# EAGLE board PocketBeagleCape (EAGLE 8.4.2)

Size 55 x 35 mm. Coordinates in mm from the lower left corner, seen from the top.
Outline: 45,35 10,35 arc90 0,25 0,10 arc90 10,0 45,0 arc90 55,10 55,25 arc90 45,35
Copper layers (1*16): Top 0.035mm / dielectric 1.5mm / Bottom 0.035mm
Design rules "default *": minimum track width 6mil, minimum drill 10mil, track to track 6mil, track to pad 6mil, pad to pad 6mil, via to via 6mil, smd to smd 6mil, copper to edge 10mil, drill to drill 8mil, minimum pad ring 10mil, minimum via ring 5mil, stop-mask expansion 4mil, vias tented up to drill 40mil, thermal gap 6mil

## Footprints (pad centres in the part's own frame; a part is rotated, then mirrored left to right if it is on the bottom)
TH-2X18-(35MIL-DIA)-W/O-SILK = drill 0.889 pad 1.524 square: 1 -21.59,-1.27 | drill 0.889 pad 1.524 octagon: 2 -21.59,1.27; 3 -19.05,-1.27; 4 -19.05,1.27; 5 -16.51,-1.27; 6 -16.51,1.27; 7 -13.97,-1.27; 8 -13.97,1.27; 9 -11.43,-1.27; 10 -11.43,1.27; 11 -8.89,-1.27; 12 -8.89,1.27; 13 -6.35,-1.27; 14 -6.35,1.27; 15 -3.81,-1.27; 16 -3.81,1.27; 17 -1.27,-1.27; 18 -1.27,1.27; 19 1.27,-1.27; 20 1.27,1.27; 21 3.81,-1.27; 22 3.81,1.27; 23 6.35,-1.27; 24 6.35,1.27; 25 8.89,-1.27; 26 8.89,1.27; 27 11.43,-1.27; 28 11.43,1.27; 29 13.97,-1.27; 30 13.97,1.27; 31 16.51,-1.27; 32 16.51,1.27; 33 19.05,-1.27; 34 19.05,1.27; 35 21.59,-1.27; 36 21.59,1.27

## Placement (x,y rotation side)
P1  [TH-2X18-(35MIL-DIA)-W/O-SILK]  27.5,4.8 0 top
P2  [TH-2X18-(35MIL-DIA)-W/O-SILK]  27.5,30.2 0 top

## Library data of the parts
P1 P2 = GHI-Headers

## Nets
3.3V: P1.14 P2.23
AIN0(1.8V): P1.19
AIN1(1.8V): P1.21
AIN2(1.8V): P1.23
AIN3(1.8V): P1.25
AIN4(1.8V): P1.27
AIN5(3.3V): P2.35
AIN6/GPIO87: P1.2
AIN7(1.8V): P2.36
AIN.VREF+: P1.18
AIN.VREF-: P1.17
BAT.TEMP: P2.16
BAT.VIN: P2.14
GND [power]: P1.15 P1.16 P1.22 P2.15 P2.21
GPIO20: P1.20
GPIO23: P2.3
GPIO26: P1.34
GPIO27: P2.19
GPIO44: P2.24
GPIO45: P2.33
GPIO46: P2.22
GPIO47: P2.18
GPIO52: P2.10
GPIO57: P2.6
GPIO58: P2.4
GPIO59: P2.2
GPIO60: P2.8
GPIO64: P2.20
GPIO65: P2.17
GPIO89: P1.4
I2C1.SCL: P2.9
I2C1.SDA: P2.11
I2C2.SCL: P1.28
I2C2.SDA: P1.26
PRU0.1: P1.33
PRU0.2: P2.32
PRU0.3: P2.30
PRU0.4: P1.31
PRU0.5: P2.34
PRU0.6: P2.28
PRU0.7: P1.29
PRU1.10: P1.35
PWM0A: P1.36
PWM1A: P2.1
PWR.BTN: P2.12
RESET#: P2.26
SPI0.CLK: P1.8
SPI0.CS: P1.6
SPI0.MISO: P1.10
SPI0.MOSI: P1.12
SPI1.CLK: P2.29
SPI1.CS: P2.31
SPI1.MISO: P2.27
SPI1.MOSI: P2.25
UART0.RX: P1.32
UART0.TX: P1.30
UART4.RX: P2.5
UART4.TX: P2.7
USB1.D+: P1.11
USB1.D-: P1.9
USB1.DRVVBUS: P1.3
USB1.ID: P1.13
USB1.VBUS: P1.5
VIN: P1.1
VIN.USB: P1.7
VOUT: P1.24 P2.13

## Tracks (layer width: path | path; a pad name or v marks a point on that pad's centre or on a via)
3.3V  (1 unrouted)
GND  (4 unrouted)
VOUT  (1 unrouted)

## Text on the board
tPlace: P2 | 2 | 36 | 1 | 35 | 2 | 36 | 1 | 35 | P1
bPlace: BAT | PRU0 | 58 | 57 | 60 | 52 | PB | + | T | 47 | 64 | 46 | 44 | RST | 6 | 3 | 2 | 5 | A7(1.8) | 59 | PWM1A | 23 | RX | TX | SCL | SDA | VOUT | GND | 65 | 27 | GND | +3.3V | MOSI | MISO | CLK | CS1 | 45 | A5/86 | U4 | I2C1 | SPI1 | P2 | SPI0 | I2C2 | U0 | P1 | A6/87 | 89 | CS0 | CLK | MISO | MOSI | +3.3V | GND | A+ | 20 | GND | VOUT | SDA | SCL | TX | RX | 26 | PWM0A | VIN | P1.10 | EN | VB | VI | - | + | ID | GND | - | 0 | 1 | 2 | 3 | 4 | 7 | 4 | 1 | USB1 | AIN (1.8V) | PRU0
Reference: 75 Mils back--> / Try to move back 75 Mils <---